# Altium PCB EV76C661_PCB.PcbDoc
Units mm, origin at the board's own origin, x right, y up, seen from the top; angles counter-clockwise.
Board outline 152.4 x 101.6 mm, 2 copper layers (Top Layer, Bottom Layer); 4 components, 42 nets, 98 pads, 0 vias.
Unrouted connection lines stored in the file: 42.
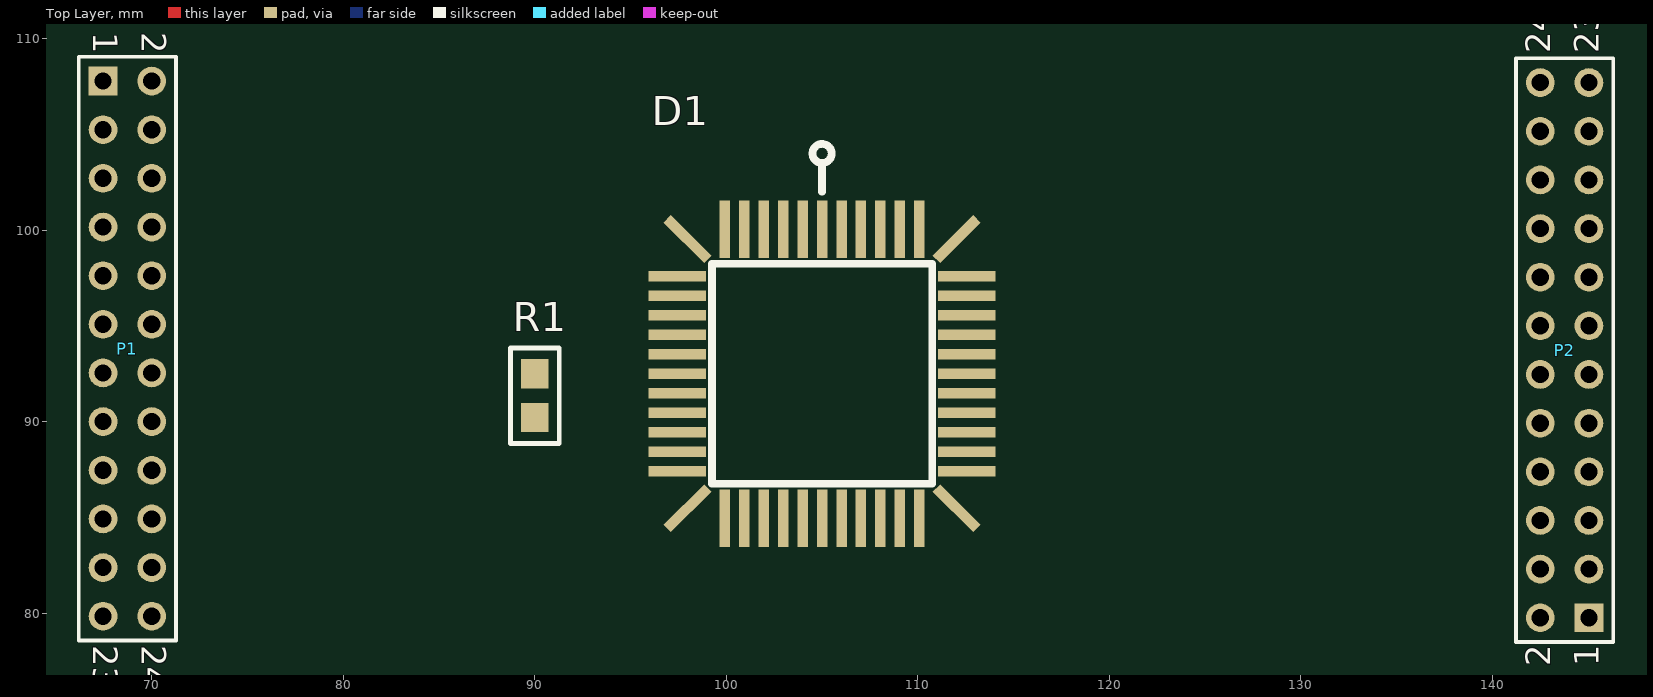
[diagram p0: Top Layer view]
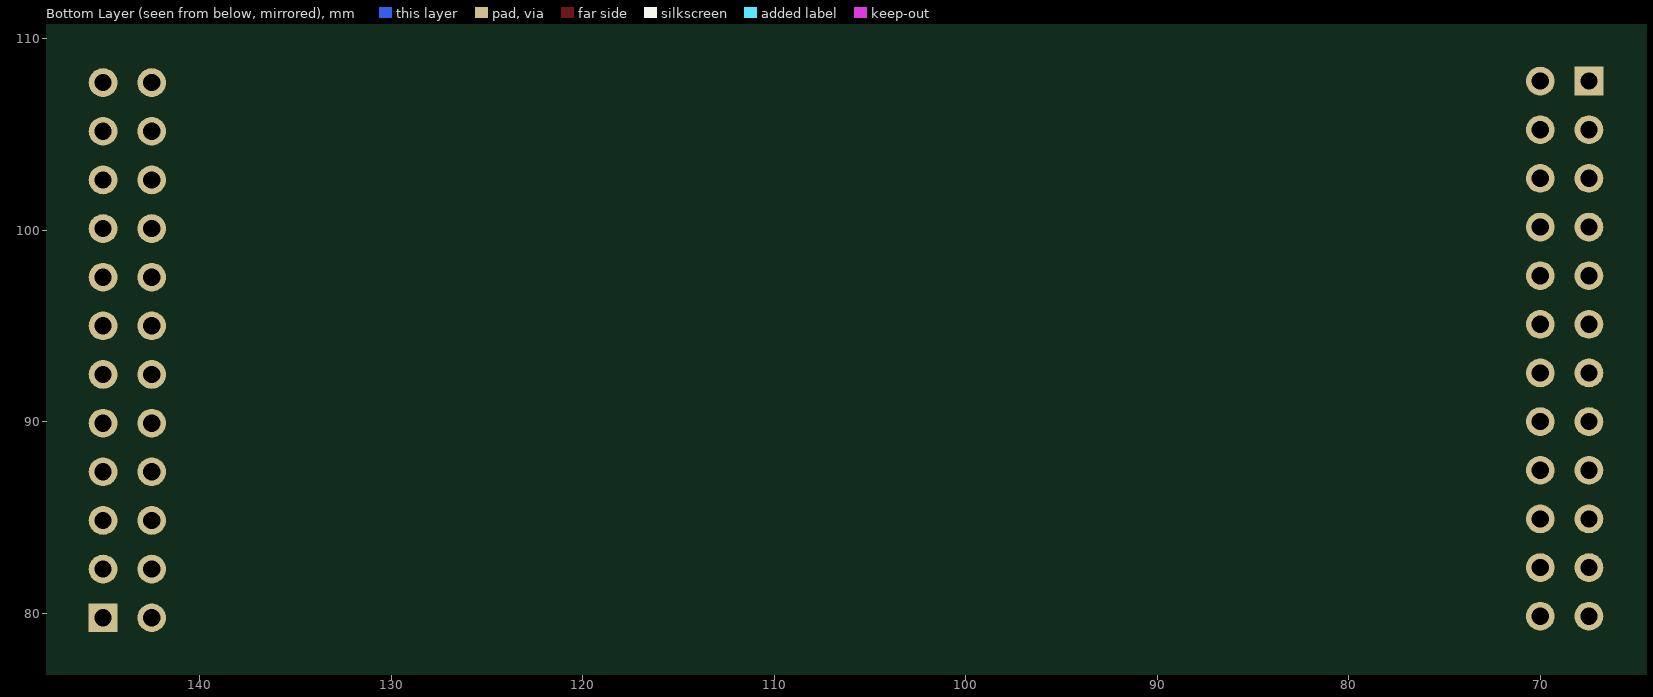
[diagram p1: Bottom Layer view, seen from below]

## Layer stack, top to bottom
Top Solder: solder mask 0.0102, Solder Resist, Dk 3.5
Top Layer: signal copper 0.0356
Dielectric 1: dielectric 0.32, FR-4, Dk 4.8
Bottom Layer: signal copper 0.0356
Bottom Solder: solder mask 0.0102, Solder Resist, Dk 3.5

## Board outline
25.4,25.4 177.8,25.4 177.8,127 25.4,127

## Design rules (kind name [scope] priority, off if disabled: settings)
Clearance [All] p1: gap=0.254 ignorepadtopadclearanceinfootprint=FALSE except(0: Arc-Hole Track-Hole SMDPad-Hole THPad-Hole Via-Hole Fill-Hole Poly-Hole Region-Hole Text-Hole)
PolygonConnect [All] p1: connectstyle=Relief reliefconductorwidth=0.254 reliefentries=4 polygonreliefangle="90 Angle" airgapwidth=0.254
RoutingVias [All] p1: holewidth=0.711 width=1.27 viastyle="Through Hole" minholewidth=0.711 minwidth=1.27 maxholewidth=0.711 maxwidth=1.27
SolderMaskExpansion [All] p1: expansion=0.102
Width [All] p1: maxlimit=0.254 minlimit=0.254 preferedwidth=0.254
30 further rules are at their usual default settings.

## Components (designator, comment, footprint, x,y, rotation, side; value= is the part's Value field where it differs from the comment)
D1 "EV76C661_aab" EV76C611_aab 105,92.5 r0 top
P1 "Header 12X2" HDR2X12 67.46,107.78 r270 top
P2 "Header 12X2" HDR2X12 145.04,79.76 r90 top
R1 "RES" RES 88.755,88.875 r0 top

## Footprints (in the part's own frame and the unit in brackets; to place one, negate y for a bottom-side part, rotate by r counter-clockwise, add the part's x,y. Pads: shape width x height; smd on the part's side, far side on the other; paste and mask are expansions set on the pad)
EV76C611_aab [mm]
  rect 0.55x3 smd: 1(0,7.55) 2(-1.016,7.55) 3(-2.032,7.55) 4(-3.048,7.55) 5(-4.064,7.55) 6(-5.08,7.55) 20(-5.08,-7.55) 21(-4.064,-7.55) 22(-3.048,-7.55) 23(-2.032,-7.55) 24(-1.016,-7.55) 25(0,-7.55) 26(1.016,-7.55) 27(2.032,-7.55) 28(3.048,-7.55) 29(4.064,-7.55) 30(5.08,-7.55) 44(5.08,7.55) 45(4.064,7.55) 46(3.048,7.55) 47(2.032,7.55) 48(1.016,7.55)
  rect 0.55x3 smd rot 45: 7(-7.025,7.025) 31(7.025,-7.025)
  rect 3x0.55 smd: 8(-7.55,5.08) 9(-7.55,4.064) 10(-7.55,3.048) 11(-7.55,2.032) 12(-7.55,1.016) 13(-7.55,0) 14(-7.55,-1.016) 15(-7.55,-2.032) 16(-7.55,-3.048) 17(-7.55,-4.064) 18(-7.55,-5.08) 32(7.55,-5.08) 33(7.55,-4.064) 34(7.55,-3.048) 35(7.55,-2.032) 36(7.55,-1.016) 37(7.55,0) 38(7.55,1.016) 39(7.55,2.032) 40(7.55,3.048) 41(7.55,4.064) 42(7.55,5.08)
  rect 0.55x3 smd rot 135: 19(-7.025,-7.025) 43(7.025,7.025)
  silkscreen extent -5.75,-5.75 5.75,12, body extent -5.75,-5.75 5.75,5.75, height 19.81
HDR2X12 [mm] "Connector; Header; 12x2 Position"
  rect 1.5x1.5 hole 0.9: 1(0,0)
  round 1.5 hole 0.9: 2(0,2.54) 3(2.54,0) 4(2.54,2.54) 5(5.08,0) 6(5.08,2.54) 7(7.62,0) 8(7.62,2.54) 9(10.16,0) 10(10.16,2.54) 11(12.7,0) 12(12.7,2.54) 13(15.24,0) 14(15.24,2.54) 15(17.78,0) 16(17.78,2.54) 17(20.32,0) 18(20.32,2.54) 19(22.86,0) 20(22.86,2.54) 21(25.4,0) 22(25.4,2.54) 23(27.94,0) 24(27.94,2.54)
  silkscreen extent -1.27,-1.27 29.21,3.81
RES [mil] "FROM_MAX"
  rect 55.98x60 smd: 1(49,52.71) 2(49,142.71)
  silkscreen extent -1,0 99,196, body extent 17,19 81,177, height 100

## Part data
P1 P2: "Header, 12-Pin, Dual row", LatestRevisionDate=17-Jul-2002, LatestRevisionNote="Re-released for DXP Platform.", Publisher="Altium Limited"

## Nets (pads, with @x,y where several pads share a name; then routed paths per layer and width w, separated by ;. In a path a pad name is that pad's centre, name@x,y a point inside that pad or via, vN(x,y) a via of type N, cw(c..) or ccw(c..) an arc to the next point about the centre after c; other vN are vias at no path point)
CLKFIX_22: D1.22 P1.22
CLKREF_23: D1.23 P1.23
CSN_46: D1.46 P2.22
D0_25: D1.25 P2.1
D1_26: D1.26 P2.2
D2_27: D1.27 P2.3
D3_28: D1.28 P2.4
D4_31: D1.31 P2.7
D5_32: D1.32 P2.8
D6_35: D1.35 P2.11
D7_36: D1.36 P2.12
D8_37: D1.37 P2.13
D9_38: D1.38 P2.14
DATACLK_24: D1.24 P1.24
FEN_40: D1.40 P2.16
FLO: D1.48 P2.24
GND_3: D1.3 P1.3
GND_7: D1.7 P1.7
GND_13: D1.13 P1.13
GND_16: D1.16 P1.16
GND_19: D1.19 P1.19
GND_20: D1.20 P1.20
GND_29: D1.29 P2.5
GND_33: D1.33 P2.9
GND_43: D1.43 P2.19
LEN_39: D1.39 P2.15
MISO_45: D1.45 P2.21
MOSI_42: D1.42 P2.18
NetD1_14: D1.14 R1.2
NetD1_15: D1.15 R1.1
RESET_1: D1.1 P1.1
SCK_41: D1.41 P2.17
TRIG_2: D1.2 P1.2
VDD18A_9: D1.9 P1.9
VDD18A_18: D1.18 P1.18
VDD18A_21: D1.21 P1.21
VDD18D_30: D1.30 P2.6
VDD18D_34: D1.34 P2.10
VDD18D_44: D1.44 P2.20
VDD33A_5: D1.5 P1.5
VDD33A_8: D1.8 P1.8
VDD33A_17: D1.17 P1.17
pads on no net: D1.4 D1.6 D1.10 D1.11 D1.12 D1.47 P1.4 P1.6 P1.10 P1.11 P1.12 P1.14 P1.15 P2.23

## Text inside footprints (layer, text, board x,y; h text height)
P1: Top Overlay "1" at 66.952,110.32 h1.27 r270; Top Overlay "2" at 69.492,110.32 h1.27 r270; Top Overlay "23" at 66.952,78.316 h1.27 r270; Top Overlay "24" at 69.492,78.316 h1.27 r270
P2: Top Overlay "1" at 145.548,77.22 h1.27 r90; Top Overlay "2" at 143.008,77.22 h1.27 r90; Top Overlay "23" at 145.548,109.224 h1.27 r90; Top Overlay "24" at 143.008,109.224 h1.27 r90